# Altium PCB Old.PcbDoc (part 1 of 2)
Units mm, origin at the board's own origin, x right, y up, seen from the top; angles counter-clockwise.
Board outline 332.63 x 105.91 mm, 4 copper layers (Top Copper, Signal Layer 1, Signal Layer 2, Bottom Copper), stack 1.17 mm thick; 206 components, 300 nets, 1472 pads, 0 vias.
Unrouted connection lines stored in the file: 997.
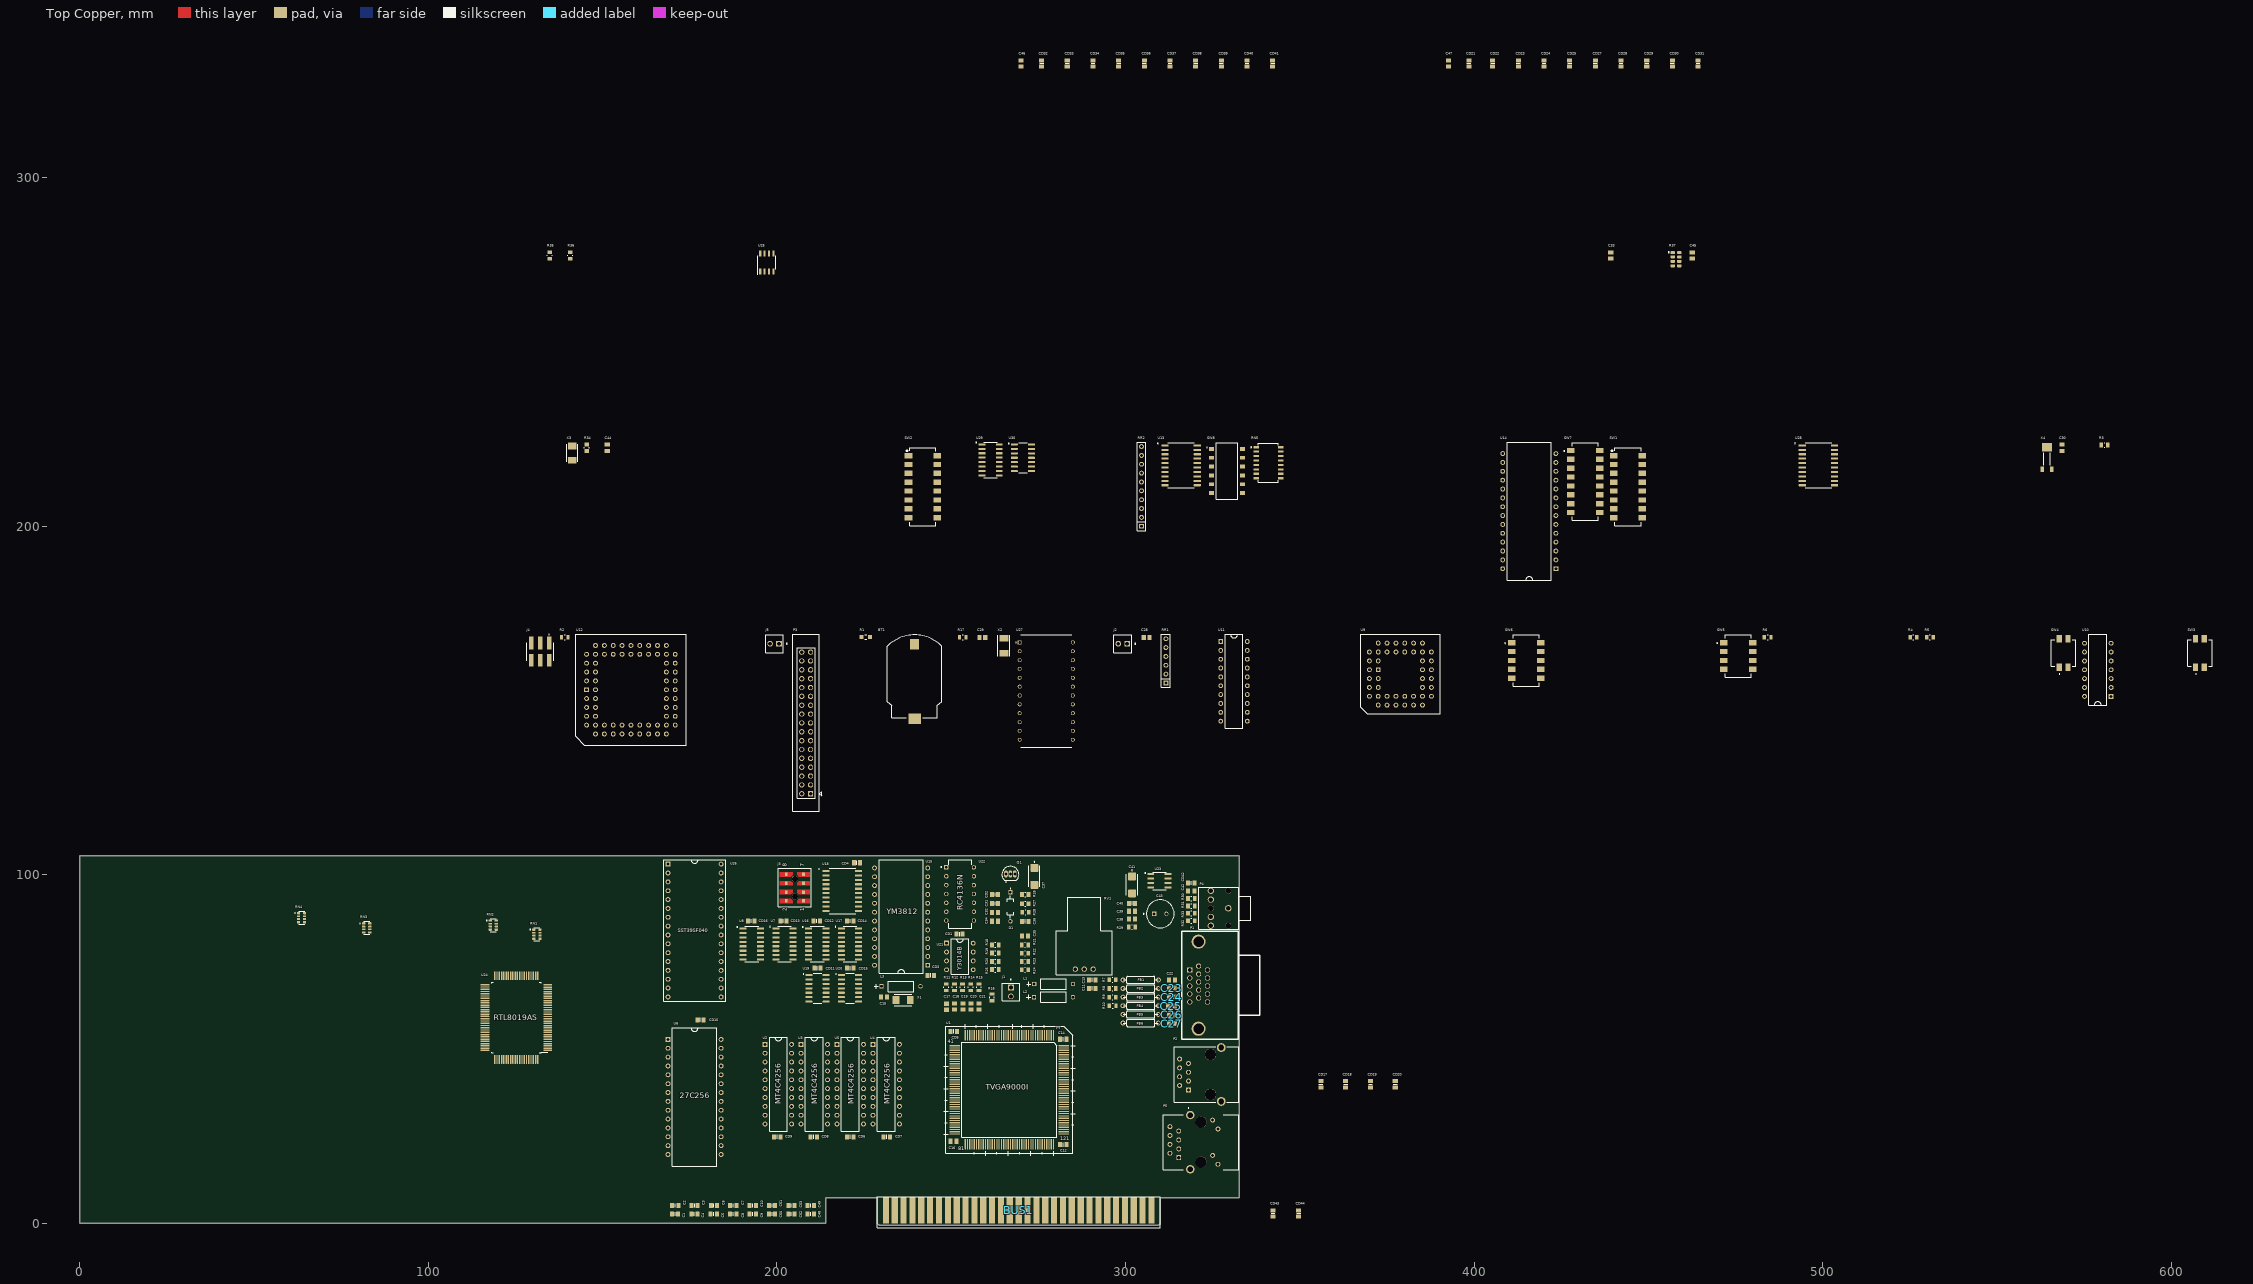
[diagram p0: Top Copper view]
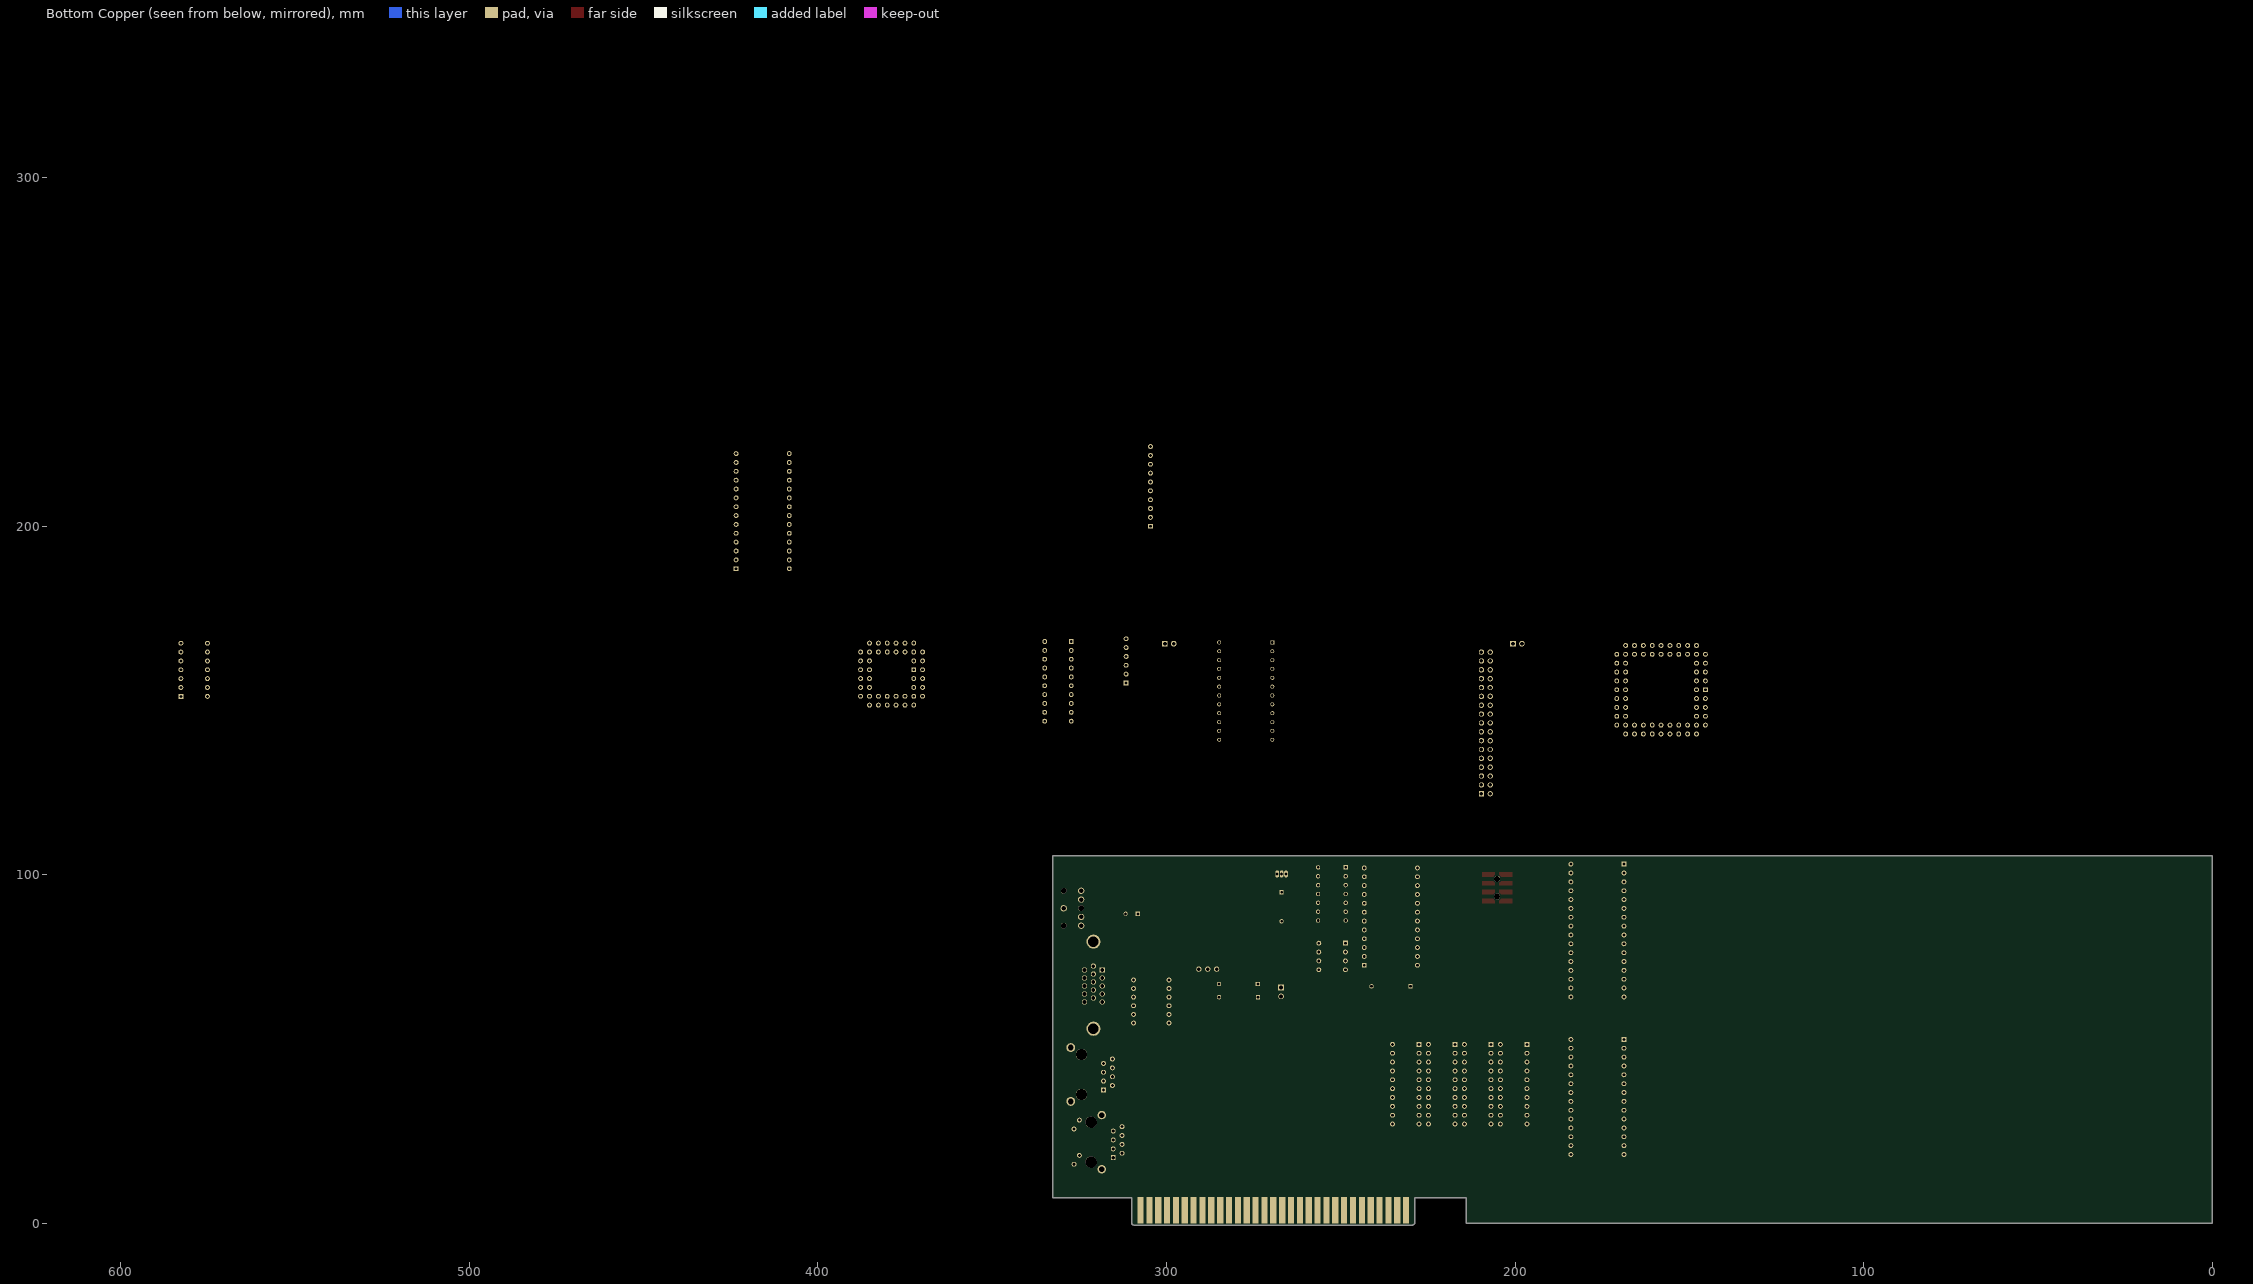
[diagram p1: Bottom Copper view, seen from below]

## Layer stack, top to bottom
Top Mask: solder mask 0.015, Solder Resist, Dk 3.8
Top Copper: signal copper 0.035
Dielectric 1: prepreg 0.1, 2313, Dk 4.05
Signal Layer 1: signal copper 0.0175
Core: core 0.865, FR-4, Dk 4.5
Signal Layer 2: signal copper 0.0175
Dielectric 2: prepreg 0.1, 2313, Dk 4.05
Bottom Copper: signal copper 0.035
Bottom Mask: solder mask 0.015, Solder Resist, Dk 3.8

## Board outline
332.625,105.41 332.625,99 332.625,10.1 cw(c332.624,10.099) 332.625,10.099 332.625,7.4 329.935,7.4 cw(c329.925,10.224) 329.925,7.4 310.025,7.4 310.025,0.2 cw(c309.325,0.2) 309.325,-0.5 229.525,-0.5 cw(c229.575,0.35) 228.725,0.4 228.725,7.4 214,7.4 214,0 0,0 0,105.41

## Design rules (kind name [scope] priority, off if disabled: settings)
Clearance [All] p1: gap=0.254 ignorepadtopadclearanceinfootprint=FALSE except(0: Arc-Hole Track-Hole SMDPad-Hole THPad-Hole Via-Hole Fill-Hole Poly-Hole Region-Hole Text-Hole)
PolygonConnect [All] p1: connectstyle=Relief reliefconductorwidth=0.254 reliefentries=4 polygonreliefangle="90 Angle" airgapwidth=0.254
RoomDefinition "SixPak Ultra" [InComponentClass('SixPak Ultra')] p1: confinementstyle=ConfineIn formatcopy=TRUE lockcomponents=FALSE outline 42.304,109.787 105.525,109.787 105.525,137.828 42.304,137.828
RoutingVias [All] p1: holewidth=0.711 width=1.27 viastyle="Through Hole" minholewidth=0.711 minwidth=1.27 maxholewidth=0.711 maxwidth=1.27
SolderMaskExpansion [All] p1: expansion=0.102 istentingtop=FALSE
Width "Schematic Width Constraint_4" [InNet('GND')] p1: maxlimit=0.508 minlimit=0.254 preferedwidth=0.508 toplayer_minwidth=0.381 midlayer1_maxwidth=0.254 midlayer1_prefwidth=0.254 midlayer2_maxwidth=0.254 midlayer2_prefwidth=0.254 bottomlayer_minwidth=0.381 minimp=50.000000 maximp=50.000000 favimp=50.000000
Width "Schematic Width Constraint_3" [InNet('+12')] p2: maxlimit=0.508 minlimit=0.254 preferedwidth=0.508 toplayer_minwidth=0.381 midlayer1_maxwidth=0.254 midlayer1_prefwidth=0.254 midlayer2_maxwidth=0.254 midlayer2_prefwidth=0.254 bottomlayer_minwidth=0.381 minimp=50.000000 maximp=50.000000 favimp=50.000000
Width "Schematic Width Constraint_2" [InNet('VCC')] p3: maxlimit=0.508 minlimit=0.254 preferedwidth=0.508 toplayer_minwidth=0.381 midlayer1_maxwidth=0.254 midlayer1_prefwidth=0.254 midlayer2_maxwidth=0.254 midlayer2_prefwidth=0.254 bottomlayer_minwidth=0.381 minimp=50.000000 maximp=50.000000 favimp=50.000000
Width "Schematic Width Constraint_1" [InNet('AVDD1')] p4: maxlimit=0.508 minlimit=0.254 preferedwidth=0.508 toplayer_minwidth=0.381 midlayer1_maxwidth=0.254 midlayer1_prefwidth=0.254 midlayer2_maxwidth=0.254 midlayer2_prefwidth=0.254 bottomlayer_minwidth=0.381 minimp=50.000000 maximp=50.000000 favimp=50.000000
Width "Schematic Width Constraint" [InNet('AVDD2')] p5: maxlimit=0.508 minlimit=0.254 preferedwidth=0.508 toplayer_minwidth=0.381 midlayer1_maxwidth=0.254 midlayer1_prefwidth=0.254 midlayer2_maxwidth=0.254 midlayer2_prefwidth=0.254 bottomlayer_minwidth=0.381 minimp=50.000000 maximp=50.000000 favimp=50.000000
Width [All] p6: maxlimit=0.254 minlimit=0.254 preferedwidth=0.254
30 further rules are at their usual default settings.

## Components (designator, comment, footprint, x,y, rotation, side; value= is the part's Value field where it differs from the comment)
BT1 "S8421-45R" BAT_S8421-45R 239.494,157.627 r0 top
BUS1 "BUSPC_DEV" Conn_Bus_ISA8 310.132,7.697 r180 top
C1 "0.1uF" CAPC2012X140N 170.781,2.659 r180 top
C2 "0.1uF" CAPC2012X140N 170.81,5.114 r180 top
C3 "0.1uF" CAPC2012X140N 176.37,5.12 r180 top
C4 "0.1uF" CAPC2012X140N 176.347,2.673 r180 top
C5 "0.1uF" CAPC2012X140N 181.912,2.673 r0 top
C6 "0.1uF" CAPC2012X140N 181.929,5.12 r0 top
C7 "0.1uF" CAPC2012X140N 187.489,5.12 r0 top
C8 "0.1uF" CAPC2012X140N 187.478,2.673 r0 top
C9 "10uF" CAPC2012X140N 193.043,2.673 r180 top
C10 "10uF" CAPC2012X140N 193.049,5.12 r180 top
C11 "10uF" CAPC2012X140N 290.475,67.418 r0 top
C12 "0.1uF" CAPC2012X140N 282.182,22.589 r180 top
C13 "10uF" CAPC2012X140N 290.475,69.837 r0 top
C14 "0.1uF" CAPC2012X140N 282.182,52.815 r0 top
C15 "0.1uF" CAPC2012X145N 230.747,64.88 r0 top
C16 "0.1uF" CAPC2012X145N 250.711,23.554 r180 top
C17 "100pF" CAPC2012X88N#1 248.655,62.117 r90 top
C18 "47pF" CAPC2012X94N 250.949,62.162 r90 top
C19 "470pF" CAPC2012X94N 253.373,62.162 r90 top
C20 "47pF" CAPC2012X94N 255.673,62.162 r90 top
C21 "47pF" CAPC2012X94N 257.969,62.162 r90 top
C22 "47pF" CAPC2012X94N 313.335,69.858 r0 top
C23 "47pF" CAPC2012X94N 313.335,67.493 r0 top
C24 "47pF" CAPC2012X94N 313.335,64.884 r0 top
C25 "1uF" CAPC2012X70 313.195,62.276 r0 top
C26 "47pF" CAPC2012X94N 313.335,59.801 r0 top
C27 "47pF" CAPC2012X94N 313.335,57.327 r0 top
C28 "22p" CAPC2013X145X50NL20T20 306.054,168.067 r0 top
C29 "22p" CAPC2013X145X50NL20T20 258.954,168.067 r0 top
C30 "4700p" CAPC2012X100N 568.723,222.497 r90 top
C31 "10uF" CAPC2012X140N 262.573,91.775 r0 top
C32 "4700p" CAPC2012X100N 262.593,89.216 r180 top
C33 "4700p" CAPC2012X100N 439.224,277.637 r90 top
C34 "4700p" CAPC2012X100N 262.593,86.647 r180 top
C35 "4700p" CAPC2012X100N 271.223,82.405 r180 top
C36 "4.7u Tantalum" CAPC2012X140N 271.248,86.647 r180 top
C37 "10u Tantalum" CAPPM6032X280N 273.876,99.529 r270 top
C38 "1000p" CAPC2012X94N 301.897,87.286 r180 top
C39 "270p" CAPC2012X88N#2 301.902,89.543 r180 top
C40 "0.1uF" CAPC2012X140N 301.882,91.79 r180 top
C41 "10u Tantalum" CAPPM6032X280N 301.892,97.099 r270 top
C42 "4700p" CAPC2012X75N 318.88,95.36 r0 top
C43 "220u" CAPPRD350W60D800H1150 309.995,88.806 r0 top
C44 "10p" CAPC2012X88N#2 151.334,222.497 r90 top
C45 "10p" CAPC2012X88N#2 462.604,277.637 r90 top
C46 "0.01u" CAPC2012X88N#2 270.074,332.777 r90 top
C47 "0.01u" CAPC2012X88N#2 392.634,332.777 r90 top
C48 "0.1uF" CAPC2012X140N 209.739,2.673 r180 top
C49 "10uF" CAPC2012X140N 209.728,5.12 r180 top
C50 "0.1uF" CAPC2012X140N 198.609,2.672 r180 top
C51 "10uF" CAPC2012X140N 198.609,5.12 r180 top
C52 "10uF" CAPC2012X140N 204.174,2.673 r180 top
C53 "10uF" CAPC2012X140N 204.168,5.12 r0 top
CD1 "0.1uF" CAPC2012X140N 252.413,82.955 r0 top
CD2 "0.1uF" CAPC2012X140N 262.573,94.344 r0 top
CD3 "0.1uF" CAPC2012X140N 244.169,71.128 r0 top
CD4 "0.1uF" CAPC2012X140N 222.953,103.437 r180 top
CD5 "0.1uF" CAPC2012X140N 250.731,55.075 r180 top
CD6 "0.1uF" CAPC2012X140N 221.047,24.824 r0 top
CD7 "0.1uF" CAPC2012X140N 231.527,24.824 r0 top
CD8 "0.1uF" CAPC2012X140N 210.568,24.824 r0 top
CD9 "0.1uF" CAPC2012X140N 200.089,24.824 r0 top
CD10 "0.1uF" CAPC2012X140N 178.072,58.365 r180 top
CD11 "0.1uF" CAPC2012X140N 211.632,73.211 r180 top
CD12 "0.1uF" CAPC2012X140N 211.453,86.749 r180 top
CD13 "0.1uF" CAPC2012X140N 201.887,86.749 r180 top
CD14 "0.1uF" CAPC2012X140N 221.018,86.749 r180 top
CD15 "0.1uF" CAPC2012X140N 221.014,73.224 r180 top
CD16 "0.1uF" CAPC2012X140N 192.672,86.749 r180 top
CD17 "0.1uF" CAPC2012X140N 356.065,39.863 r90 top
CD18 "0.1uF" CAPC2012X140N 363.175,39.863 r90 top
CD19 "0.1uF" CAPC2012X140N 370.285,39.863 r90 top
CD20 "0.1uF" CAPC2012X140N 377.395,39.863 r90 top
CD21 "0.1uF" CAPC2012X140N 398.494,332.747 r90 top
CD22 "0.1uF" CAPC2012X140N 405.354,332.747 r90 top
CD23 "0.1uF" CAPC2012X140N 412.714,332.747 r90 top
CD24 "0.1uF" CAPC2012X140N 420.084,332.747 r90 top
CD25 "0.1uF" CAPC2012X140N 427.444,332.747 r90 top
CD27 "0.1uF" CAPC2012X140N 434.814,332.747 r90 top
CD28 "0.1uF" CAPC2012X140N 442.174,332.747 r90 top
CD29 "0.1uF" CAPC2012X140N 449.544,332.747 r90 top
CD30 "0.1uF" CAPC2012X140N 456.904,332.747 r90 top
CD31 "0.1uF" CAPC2012X140N 464.264,332.747 r90 top
CD32 "0.1uF" CAPC2012X140N 275.944,332.747 r90 top
CD33 "0.1uF" CAPC2012X140N 283.304,332.747 r90 top
CD34 "0.1uF" CAPC2012X140N 290.674,332.747 r90 top
CD35 "0.1uF" CAPC2012X140N 298.034,332.747 r90 top
CD36 "0.1uF" CAPC2012X140N 305.404,332.747 r90 top
CD37 "0.1uF" CAPC2012X140N 312.764,332.747 r90 top
CD38 "0.1uF" CAPC2012X140N 320.124,332.747 r90 top
CD39 "0.1uF" CAPC2012X140N 327.494,332.747 r90 top
CD40 "0.1uF" CAPC2012X140N 334.854,332.747 r90 top
CD41 "0.1uF" CAPC2012X140N 342.224,332.747 r90 top
CD42 "10uF" CAPC2012X140N 318.9,97.62 r0 top
CD43 "10uF" CAPC2012X140N 342.303,2.827 r90 top
CD44 "10uF" CAPC2012X140N 349.669,2.827 r90 top
D1 "1N4148" DIOAD829W49L456D191 266.992,90.793 r270 top
FB1 "FILTER" FILTER 299.294,69.833 r0 top
FB2 "FILTER" FILTER 299.294,67.358 r0 top
FB3 "FILTER" FILTER 299.294,64.884 r0 top
FB4 "FILTER" FILTER 309.454,62.41 r180 top
FB5 "FILTER" FILTER 309.454,59.936 r180 top
FB6 "FILTER" FILTER 309.454,57.462 r180 top
J1 "640452-2" TE_640452-2 267.145,67.648 r90 top
J2 "640452-2" TE_640452-2 300.474,166.287 r0 top
J3 "OPL CS" SAMTEC-TSM-104-01-X-DV-A 205.143,96.293 r90 top
J4 "OPL_IRQ" SAMTEC_TSM-103-01-T-DV 132.104,164.007 r0 top
J5 "640452-2" TE_640452-2 200.584,166.287 r0 top
L1 "5.7 uH" IND_BOURNS_78F 273.777,68.653 r0 top
L2 "5.7 uH" IND_BOURNS_78F 273.767,64.884 r0 top
L3 "2.7 uH" IND_BOURNS_78F 230.02,67.978 r0 top
P1 "VGA" VGA_Conn 316.154,52.752 r0 top
P2 "A-2004-2-4-LP/S-R" ASSMANN_A-2004-1-4-LP-N-R 324.425,42.7 r90 top
P3 "FLOPPY" "Floppy Connector" 212.204,118.027 r90 top
P4 "AUDIO_OUT" Headphone 321.065,84.421 r0 top
P5 "RJMG1BD3B8K1ANR" CONN_RJMG1BD3B8K1ANR 321.635,23.28 r90 top
Q1 "2N3904" TO92127P495H495-3 266.992,100.236 r0 top
R1 "100" RES_ERJ6ENF1000V 225.514,168.197 r0 top
R2 "1k" RESC2012X60N 139.154,168.147 r0 top
R3 "150" RESC2012X70N 580.893,223.287 r0 top
R4 "33" RESC2012X65N 526.034,168.147 r0 top
R5 "33" RESC2012X65N 530.774,168.147 r0 top
R6 "4.7k" RESC2012X60N 484.244,168.147 r0 top
R7 "150" RESC2012X70N 296.271,69.858 r180 top
R8 "150" RESC2012X70N 296.271,67.358 r180 top
R9 "150" RESC2012X70N 296.271,64.884 r180 top
R10 "4.7k" RESC2012X60N 296.316,62.41 r180 top
R11 "4.7k" RESC2012X60N 248.595,67.735 r90 top
R12 "4.7k" RESC2012X60N 250.939,67.735 r90 top
R13 "4.7k" RESC2012X60N 253.282,67.735 r90 top
R14 "4.7k" RESC2012X60N 255.626,67.735 r90 top
R15 "4.7k" RESC2012X60N 257.969,67.735 r90 top
R16 "4.7k" RESC2012X60N 261.684,64.803 r270 top
R17 "2.2k" RESC2012X60N 253.334,168.147 r0 top
R18 "2.2k" RESC2012X70N 262.658,79.89 r0 top
R19 "2.2k" RESC2012X70N 262.658,77.519 r180 top
R20 "12K" RESC2012X70N 262.658,75.149 r0 top
R21 "10k" RESC2012X70N 271.158,79.89 r0 top
R22 "2.2k" RESC2012X70N 271.158,77.493 r0 top
R23 "2.2k" RESC2012X70N 271.158,75.122 r180 top
R24 "1.5k" RESC2012X70N 271.158,72.752 r0 top
R25 "10k" RESC2012X70N 262.658,72.778 r180 top
R26 "2.2k" RESC2012X70N 271.26,94.344 r0 top
R27 "2.2k" RESC2012X70N 271.26,91.677 r0 top
R28 "10k" RESC2012X70N 271.288,89.264 r0 top
R29 "8.2k" RESC2012X70N 301.897,84.983 r180 top
R30 "10" RESC2012X70N 318.885,93.192 r0 top
R31 "10k" RESC2012X70N 318.885,91.07 r0 top
R32 "10" RESC2012X70N 318.885,86.825 r0 top
R33 "10" RESC2012X70N 318.885,88.948 r0 top
R34 "1M" RESC2012X70N 145.434,222.497 r90 top
R35 "470" RESC2012X70N 134.834,277.637 r90 top
R36 "470" RESC2012X70N 140.694,277.637 r90 top
R37 "27k" RESCAV127P508X200X70-8N 457.954,276.597 r0 top
RN1 "10k" RESCAXS80P320X160X60-8N 131.134,82.958 r0 top
RN2 "10k" RESCAXS80P320X160X60-8N 118.637,85.56 r0 top
RN3 "10k" RESCAXS80P320X160X60-8N 82.334,84.742 r0 top
RN4 "10k" RESCAXS80P320X160X60-8N 63.639,87.701 r0 top
RN5 "10k" SOIC127P762X240-16N 341.014,218.207 r0 top
RR1 "1k" "Res Network RR2 Floppy" 312.914,153.587 r90 top
RR2 "10k" "Res Network RR1 Floppy ROM" 306.004,198.717 r90 top
RV1 "10k" Potentiometer 296.177,71.28 r90 top
SW1 "1-1825058-9" SW_1-1825058-9 444.174,211.347 r0 top
SW2 "1-1825058-9" SW_1-1825058-9 241.884,211.347 r0 top
SW3 "1825059-1" SW_1825059-1 608.253,163.617 r90 top
SW4 "1825059-1" SW_1825059-1 569.123,163.617 r90 top
SW5 "1-1825059-7" SW_1-1825059-7 475.804,162.757 r0 top
SW6 "2-1825059-3" SW_2-1825059-3 414.954,161.487 r0 top
SW7 "4-1825059-1" SW_4-1825059-1 431.944,212.817 r0 top
SW8 "DS04-254-2-06BK-SMT-TR" SW_DS04-254-2-06BK-SMT-TR 329.134,215.837 r0 top
U1 "TVGA9000I" TVGA9000 284.973,20.005 r90 top
U2 "MT4C4256" MT4C4256 197.758,53.5 r270 top
U3 "MT4C4256" MT4C4256 208.068,53.5 r270 top
U4 "MT4C4256" MT4C4256 228.689,53.5 r270 top
U5 "MT4C4256" MT4C4256 218.379,53.5 r270 top
U6 "27C256" 27C256 170.041,56.066 r270 top
U7 "SN74ALS138ADR" SOIC127P600X175-16N 202.172,80.113 r0 top
U8 "SN74ALS138ADR" SOIC127P600X175-16N 192.774,80.114 r0 top
U9 "16550-PLCC" 16550_PLCC 368.324,146.887 r0 top
U10 "1.8432MHz" "Osc_Socket 4PIN" 581.633,148.587 r90 top
U11 "GD75232" GD75232 326.444,141.647 r0 top
U12 "82077AA" 82077AA 143.264,138.347 r0 top
U13 "SN74LS688DW" SOIC127P1030X265-20N 315.964,217.467 r0 top
U14 "28C64" 27C256 422.204,184.497 r90 top
U15 "YM3812" YM3812 243.396,71.611 r90 top
U16 "SN74ALS138ADR" SOIC127P600X175-16N 211.57,80.113 r0 top
U17 "SN74ALS138ADR" SOIC127P600X175-16N 220.968,80.114 r0 top
U18 "SN74LS245DW" SOIC127P1030X265-20N 218.758,95.36 r0 top
U19 "SN74LS04DR" SOIC127P600X175-14N 211.643,67.42 r0 top
U20 "SN74LS74AD" SOIC127P600X175-14N 220.968,67.42 r0 top
U21 "Y3014B" Y3014B 248.223,81.821 r270 top
U22 "RC4136N" DIP794W45P254L1969H508Q14 252.565,94.487 r0 top
U23 "LM386MX-1/NOPB" SOIC127P599X175-8N 309.715,98.255 r0 top
U24 "RTL8019AS" "Ethernet Controller" 135.098,45.972 r90 top
U25 "93LC46C" 93LC46C 194.324,271.967 r0 top
U26 "SST39SF040" SST39LF040 167.374,63.677 r0 top
U27 "DS12885" DIP1524W46P254L3226H508Q24 277.284,152.697 r0 top
U28 "SN74LS688DW" SOIC127P1030X265-20N 498.814,217.467 r0 top
U29 "SN74HCT139D" SOIC127P600X175-16N 261.334,219.017 r0 top
U30 "CD74HC04M" SOIC127P600X175-14N 270.594,219.627 r0 top
X1 "ABM3-40.000MHZ-B2-T" XTAL_ABM3-40.000MHZ-B2-T 236.208,64.067 r0 top
X2 "ABM7-24.000MHZ-D2Y-T" XTAL_ABM7-24.000MHZ-D2Y-T 265.104,165.727 r90 top
X3 "20MHz" XTAL_ABM3-20.000MHZ-B2-T 141.324,220.967 r90 top
X4 "32.768K" XTAL_MS1V-T1K-32.768KHZ-7PF-20PPM-TA-QC-AU 564.373,219.907 r0 top

## Footprints (in the part's own frame and the unit in brackets; to place one, negate y for a bottom-side part, rotate by r counter-clockwise, add the part's x,y. Pads: shape width x height; smd on the part's side, far side on the other; paste and mask are expansions set on the pad)
27C256 [mil]
  rect 55x55 hole 32 paste-55 mask+10: 1(130,-50)
  round 55 hole 32 paste-55 mask+10: 2(230,-50) 3(330,-50) 4(430,-50) 5(530,-50) 6(630,-50) 7(730,-50) 8(830,-50) 9(930,-50) 10(1030,-50) 11(1130,-50) 12(1230,-50) 13(1330,-50) 14(1430,-50) 15(1430,550) 16(1330,550) 17(1230,550) 18(1130,550) 19(1030,550) 20(930,550) 21(830,550) 22(730,550) 23(630,550) 24(530,550) 25(430,550) 26(330,550) 27(230,550) 28(130,550)
  silkscreen extent 0,0 1560,500
93LC46C [mm]
  rrect25% 0.6x1.75 smd mask+0: 1(0.889,1.108) 2(2.159,1.108) 3(3.429,1.108) 4(4.699,1.108) 5(4.699,6.258) 6(3.429,6.258) 7(2.159,6.258) 8(0.889,6.258)
  silkscreen extent 0.23,0.23 5.35,5.63
16550_PLCC [mil]
  rect 55x55 hole 32 paste-55 mask+10: 1(165,470)
  round 55 hole 32 paste-55 mask+10: 2(65,370) 3(165,370) 4(65,270) 5(165,270) 6(65,170) 7(165,70) 8(165,170) 9(265,70) 10(265,170) 11(365,70) 12(365,170) 13(465,70) 14(465,170) 15(565,70) 16(565,170) 17(665,70) 18(765,170) 19(665,170) 20(765,270) 21(665,270) 22(765,370) 23(665,370) 24(765,470) 25(665,470) 26(765,570) 27(665,570) 28(765,670) 29(665,770) 30(665,670) 31(565,770) 32(565,670) 33(465,770) 34(465,670) 35(365,770) 36(365,670) 37(265,770) 38(265,670) 39(165,770) 40(65,670) 41(165,670) 42(65,570) 43(165,570) 44(65,470)
  silkscreen extent -35,-30 865,870
82077AA [mil]
  rect 55x55 hole 32 paste-55 mask+10: 1(85,580)
  round 55 hole 32 paste-55 mask+10: 2(185,580) 3(85,480) 4(185,480) 5(85,380) 6(185,380) 7(85,280) 8(185,280) 9(85,180) 10(185,80) 11(185,180) 12(285,80) 13(285,180) 14(385,80) 15(385,180) 16(485,80) 17(485,180) 18(585,80) 19(585,180) 20(685,80) 21(685,180) 22(785,80) 23(785,180) 24(885,80) 25(885,180) 26(985,80) 27(1085,180) 28(985,180) 29(1085,280) 30(985,280) 31(1085,380) 32(985,380) 33(1085,480) 34(985,480) 35(1085,580) 36(985,580) 37(1085,680) 38(985,680) 39(1085,780) 40(985,780) 41(1085,880) 42(985,880) 43(1085,980) 44(985,1080) 45(985,980) 46(885,1080) 47(885,980) 48(785,1080) 49(785,980) 50(685,1080) 51(685,980) 52(585,1080) 53(585,980) 54(485,1080) 55(485,980) 56(385,1080) 57(385,980) 58(285,1080) 59(285,980) 60(185,1080) 61(85,980) 62(185,980) 63(85,880) 64(185,880) 65(85,780) 66(185,780) 67(85,680) 68(185,680)
  silkscreen extent -40,-45 1210,1205
ASSMANN_A-2004-1-4-LP-N-R [mm]
  rect 1.408x1.408 hole 0.9: 1(-4.445,6.35)
  round 1.408 hole 0.9: 2(-3.175,8.89) 3(-1.905,6.35) 4(-0.635,8.89) 5(0.635,6.35) 6(1.905,8.89) 7(3.175,6.35) 8(4.445,8.89)
  round 2.55 hole 1.7: S1(-7.715,-3.05) S2(7.715,-3.05)
  round 3.2 hole 3.2 unplated: ""(-5.715,0) ""(5.715,0)
  silkscreen extent -9.72,-8.13 8,10.37
BAT_S8421-45R [mm]
  rect 2.6x3 smd: NEG(0,8.5)
  rect 3.6x3 smd: POS(0,-12.9)
  silkscreen extent -7.8,-12.64 7.8,11.18
CAPC2012X70 [mm]
  rect 1.3x1.5 smd: 1(-0.95,0) 2(0.95,0)
  silkscreen extent -0.15,-0.65 0.15,0.65
CAPC2012X75N [mm]
  rect 1.15x1.47 smd: 1(-0.88,0) 2(0.88,0)
  body extent -1,-0.63 1,0.63, height 0.75
CAPC2012X88N#1 [mm]
  rect 1.24x1.56 smd: 1(-0.885,0) 2(0.885,0)
CAPC2012X88N#2 [mm]
  rect 1.16x1.47 smd: 1(-0.875,0) 2(0.875,0)
CAPC2012X94N [mm]
  rect 1.16x1.47 smd: 1(-0.88,0) 2(0.88,0)
CAPC2012X100N [mm]
  rect 1.16x1.47 smd: 1(-0.875,0) 2(0.875,0)
CAPC2012X140N [mm]
  rect 1.15x1.45 smd: 1(-0.9,0) 2(0.9,0)
  silkscreen extent 0,-0.55 0,0.55
CAPC2012X145N [mm]
  rect 1.15x1.47 smd: 1(-0.88,0) 2(0.88,0)
  body extent -1,-0.63 1,0.63, height 1.45
CAPC2013X145X50NL20T20 [mm] "Chip Capacitor, 2-Leads, Body 2.00x1.25mm, IPC Medium Density"
  rect 1.25x1.45 smd: 1(-0.825,0) 2(0.825,0)
  body extent -1.1,-0.72 1.1,0.72, height 1.45
CAPPM6032X280N [mm]
  rrect25% 2.24x2.32 smd: 1(-2.435,0) 2(2.435,0)
  silkscreen extent -4.28,-1.6 3,1.6
CAPPRD350W60D800H1150 [mm]
  round 1.2 hole 0.85: N(1.75,0)
  rect 1.2x1.2 hole 0.85: P(-1.75,0)
  silkscreen extent -4.85,-4 4,4, body extent -4,-4 4,4, height 11.5
Conn_Bus_ISA8 [mil]
  rect 70x300 smd far side paste-300 mask+10: 1(3105,155) 2(3005,155) 3(2905,155) 4(2805,155) 5(2705,155) 6(2605,155) 7(2505,155) 8(2405,155) 9(2305,155) 10(2205,155) 11(2105,155) 12(2005,155) 13(1905,155) 14(1805,155) 15(1705,155) 16(1605,155) 17(1505,155) 18(1405,155) 19(1305,155) 20(1205,155) 21(1105,155) 22(1005,155) 23(905,155) 24(805,155) 25(705,155) 26(605,155) 27(505,155) 28(405,155) 29(305,155) 30(205,155) 31(105,155)
  rect 70x300 smd paste-300 mask+10: 32(3105,155) 33(3005,155) 34(2905,155) 35(2805,155) 36(2705,155) 37(2605,155) 38(2505,155) 39(2405,155) 40(2305,155) 41(2205,155) 42(2105,155) 43(2005,155) 44(1905,155) 45(1805,155) 46(1705,155) 47(1605,155) 48(1505,155) 49(1405,155) 50(1305,155) 51(1205,155) 52(1105,155) 53(1005,155) 54(905,155) 55(805,155) 56(705,155) 57(605,155) 58(505,155) 59(405,155) 60(305,155) 61(205,155) 62(105,155)
  silkscreen extent 5,5 3205,355
CONN_RJMG1BD3B8K1ANR [mm]
  round 2.4 hole 1.6: 1(-7.775,3.05) 2(7.775,3.05)
  round 1.398 hole 0.89: L1(6.325,-3.38) L2(3.785,-4.9) L3(-3.785,-3.38) L4(-6.325,-4.9)
  rect 1.408x1.408 hole 0.9: R1(-4.45,6.34)
  round 1.408 hole 0.9: R2(-3.18,8.88) R3(-1.91,6.34) R4(-0.63,8.88) R5(0.64,6.34) R6(1.91,8.88) R7(3.18,6.34) R8(4.45,8.88)
  round 3.25 hole 3.25 unplated: ""(-5.715,0) ""(5.715,0)
  silkscreen extent -7.87,-10.89 7.88,10.83
DIOAD829W49L456D191 [mm]
  round 1.238 hole 0.73: A(4.146,0)
  rect 1.238x1.238 hole 0.73: C(-4.146,0)
  silkscreen extent -5.4,-0.96 3.2,0.96
DIP794W45P254L1969H508Q14 [mm]
  rect 1.248x1.248 hole 0.74: 1(-3.97,7.62)
  round 1.248 hole 0.74: 2(-3.97,5.08) 3(-3.97,2.54) 4(-3.97,0) 5(-3.97,-2.54) 6(-3.97,-5.08) 7(-3.97,-7.62) 8(3.97,-7.62) 9(3.97,-5.08) 10(3.97,-2.54) 11(3.97,0) 12(3.97,2.54) 13(3.97,5.08) 14(3.97,7.62)
  silkscreen extent -5.57,-9.85 3.3,9.85
DIP1524W46P254L3226H508Q24 [mm]
  rect 1.14x1.14 hole 0.79: 1(-7.62,13.97)
  round 1.14 hole 0.79: 2(-7.62,11.43) 3(-7.62,8.89) 4(-7.62,6.35) 5(-7.62,3.81) 6(-7.62,1.27) 7(-7.62,-1.27) 8(-7.62,-3.81) 9(-7.62,-6.35) 10(-7.62,-8.89) 11(-7.62,-11.43) 12(-7.62,-13.97) 13(7.62,-13.97) 14(7.62,-11.43) 15(7.62,-8.89) 16(7.62,-6.35) 17(7.62,-3.81) 18(7.62,-1.27) 19(7.62,1.27) 20(7.62,3.81) 21(7.62,6.35) 22(7.62,8.89) 23(7.62,11.43) 24(7.62,13.97)
  silkscreen extent -8.79,-16.13 7.3,16.13
"Ethernet Controller" [mm]
  rrect25% 0.4x2.5 smd mask+0: 1(3.629,0.858) 2(4.279,0.858) 3(4.929,0.858) 4(5.579,0.858) 5(6.204,0.858) 6(6.854,0.858) 7(7.504,0.858) 8(8.154,0.858) 9(8.804,0.858) 10(9.454,0.858) 11(10.104,0.858) 12(10.754,0.858) 13(11.404,0.858) 14(12.054,0.858) 15(12.704,0.858) 16(13.354,0.858) 17(14.004,0.858) 18(14.654,0.858) 19(15.304,0.858) 20(15.954,0.858) 21(16.604,0.858) 22(17.254,0.858) 23(17.904,0.858) 24(18.554,0.858) 25(19.204,0.858) 26(19.854,0.858) 27(20.504,0.858) 28(21.154,0.858) 29(21.804,0.858) 30(22.454,0.858) 51(22.479,18.858) 52(21.829,18.858) 53(21.179,18.858) 54(20.529,18.858) 55(19.879,18.858) 56(19.229,18.858) 57(18.579,18.858) 58(17.929,18.858) 59(17.279,18.858) 60(16.629,18.858) 61(15.979,18.858) 62(15.329,18.858) 63(14.679,18.858) 64(14.029,18.858) 65(13.379,18.858) 66(12.729,18.858) 67(12.079,18.858) 68(11.429,18.858) 69(10.779,18.858) 70(10.129,18.858) 71(9.479,18.858) 72(8.829,18.858) 73(8.179,18.858) 74(7.529,18.858) 75(6.879,18.858) 76(6.229,18.858) 77(5.579,18.858) 78(4.929,18.858) 79(4.279,18.858) 80(3.629,18.858)
  rrect25% 2.5x0.4 smd mask+0: 31(25.054,3.683) 32(25.054,4.333) 33(25.054,4.983) 34(25.054,5.633) 35(25.054,6.283) 36(25.054,6.933) 37(25.054,7.583) 38(25.054,8.233) 39(25.054,8.883) 40(25.054,9.533) 41(25.054,10.183) 42(25.054,10.833) 43(25.054,11.483) 44(25.054,12.133) 45(25.054,12.783) 46(25.054,13.433) 47(25.054,14.083) 48(25.054,14.733) 49(25.054,15.383) 50(25.054,16.033) 81(1.054,16.033) 82(1.054,15.383) 83(1.054,14.733) 84(1.054,14.083) 85(1.054,13.433) 86(1.054,12.783) 87(1.054,12.133) 88(1.054,11.483) 89(1.054,10.833) 90(1.054,10.183) 91(1.054,9.533) 92(1.054,8.883) 93(1.054,8.233) 94(1.054,7.583) 95(1.054,6.933) 96(1.054,6.283) 97(1.054,5.633) 98(1.054,4.983) 99(1.054,4.333) 100(1.054,3.683)
  silkscreen extent 2.94,0.86 23.16,16.97
FILTER [mil]
  round 55 hole 32 paste-55 mask+10: 1(0,0) 2(400,0)
  silkscreen extent 0,-40 400,40
"Floppy Connector" [mil]
  rect 60x60 hole 40 paste-60 mask+10: 1(205,100)
  round 60 hole 40 paste-60 mask+10: 2(205,200) 3(305,100) 4(305,200) 5(405,100) 6(405,200) 7(505,100) 8(505,200) 9(605,100) 10(605,200) 11(705,100) 12(705,200) 13(805,100) 14(805,200) 15(905,100) 16(905,200) 17(1005,100) 18(1005,200) 19(1105,100) 20(1105,200) 21(1205,100) 22(1205,200) 23(1305,100) 24(1305,200) 25(1405,100) 26(1405,200) 27(1505,100) 28(1505,200) 29(1605,100) 30(1605,200) 31(1705,100) 32(1705,200) 33(1805,100) 34(1805,200)
  silkscreen extent 5,-25 2005,300
GD75232 [mil]
  rect 55x55 hole 32 paste-55 mask+10: 1(35,995)
  round 55 hole 32 paste-55 mask+10: 2(35,895) 3(35,795) 4(35,695) 5(35,595) 6(35,495) 7(35,395) 8(35,295) 9(35,195) 10(35,95) 11(335,95) 12(335,195) 13(335,295) 14(335,395) 15(335,495) 16(335,595) 17(335,695) 18(335,795) 19(335,895) 20(335,995)
  silkscreen extent 85,15 285,1075
Headphone [mil]
  round 70.9 hole 51.2 paste-70.9 mask+0: 1(331.9,235) 2(135,431.9) 3(135,333.4) 4(135,136.6) 5(135,38.1)
  round 63 hole 63 paste-63 mask+0: Un1(135,235) Un2(331.9,431.9) Un3(331.9,38.1)
  silkscreen extent -3,-1 588,471
IND_BOURNS_78F [mil]
  rect 50x50 hole 30 mask+0: 1(0,0)
  round 50 hole 30 mask+0: 2(440,0)
  silkscreen extent -85,-60 365,60, body extent -10,-55 450,55, height 110
MT4C4256 [mil]
  rect 55x55 hole 32 paste-55 mask+10: 1(85,-45)
  round 55 hole 32 paste-55 mask+10: 2(185,-45) 3(285,-45) 4(385,-45) 5(485,-45) 6(585,-45) 7(685,-45) 8(785,-45) 9(885,-45) 10(985,-45) 11(985,255) 12(885,255) 13(785,255) 14(685,255) 15(585,255) 16(485,255) 17(385,255) 18(285,255) 19(185,255) 20(85,255)
  silkscreen extent 5,5 1065,205
"Osc_Socket 4PIN" [mil]
  rect 55x55 hole 32 paste-55 mask+10: 1(102.17,-44.76)
  round 55 hole 32 paste-55 mask+10: 2(202.17,-44.76) 3(302.17,-44.76) 4(402.17,-44.76) 5(502.17,-44.76) 6(602.17,-44.76) 7(702.17,-44.76) 8(702.17,255.24) 9(602.17,255.24) 10(502.17,255.24) 11(402.17,255.24) 12(302.17,255.24) 13(202.17,255.24) 14(102.17,255.24)
  silkscreen extent 2,5 802,205
Potentiometer [mil]
  round 60 hole 40 paste-60 mask+0: 1(65,215) 2(65,315) 3(65,415)
  silkscreen extent 0,0 875,630
"Res Network RR1 Floppy ROM" [mil]
  rect 55x55 hole 32 paste-55 mask+10: 1(50,55)
  round 55 hole 32 paste-55 mask+10: 2(150,55) 3(250,55) 4(350,55) 5(450,55) 6(550,55) 7(650,55) 8(750,55) 9(850,55) 10(950,55)
  silkscreen extent 0,5 1000,105
"Res Network RR2 Floppy" [mil]
  rect 55x55 hole 32 paste-55 mask+10: 1(55.93,52.43)
  round 55 hole 32 paste-55 mask+10: 2(155.93,52.43) 3(255.93,52.43) 4(355.93,52.43) 5(455.93,52.43) 6(555.93,52.43)
  silkscreen extent 6,2 606,102
RES_ERJ6ENF1000V [mm]
  rect 1.15x1.15 smd: 1(-1.175,0) 2(1.175,0)
  silkscreen extent -0.28,-0.62 0.28,0.62
RESC2012X60N [mm]
  rect 0.92x1.38 smd: 1(-0.955,0) 2(0.955,0)
  silkscreen extent -0.17,-0.68 0.17,0.68
RESC2012X65N [mm]
  rect 1.01x1.38 smd: 1(-0.95,0) 2(0.95,0)
  silkscreen extent -0.12,-0.68 0.12,0.68
RESC2012X70N [mm]
  rect 1.04x1.38 smd: 1(-0.94,0) 2(0.94,0)
  silkscreen extent -0.1,-0.68 0.1,0.68
RESCAV127P508X200X70-8N [mm]
  rrect53% 1.24x0.86 smd: 1(-0.94,1.905) 2(-0.94,0.635) 3(-0.94,-0.635) 4(-0.94,-1.905) 5(0.94,-1.905) 6(0.94,-0.635) 7(0.94,0.635) 8(0.94,1.905)
  silkscreen extent -2.2,1.85 -1.9,2.15
RESCAXS80P320X160X60-8N [mm]
  rrect50% 0.93x0.68 smd: 1(-0.87,1.3) 4(-0.87,-1.3) 5(0.87,-1.3) 8(0.87,1.3)
  rrect50% 0.93x0.48 smd: 2(-0.87,0.4) 3(-0.87,-0.4) 6(0.87,-0.4) 7(0.87,0.4)
  silkscreen extent -2,-1.85 0.88,1.85, body extent -1.6,-0.8 1.6,0.8, height 0.6
SAMTEC-TSM-104-01-X-DV-A [mil]
  rect 40x30 smd mask+0: 1(-150,-97.48) 2(-150,97.48) 3(-50,-97.48) 4(-50,97.48) 5(50,-97.48) 6(50,97.48) 7(150,-97.48) 8(150,97.48)
  round 68.11 hole 68.11 unplated: MH1(100,0) MH2(-100,0)
  Top Copper region: -125,-169.92 -125,-45.12 -145.08,-25.04 -175,-25.04 -175,-169.92 -125,-169.92 -125,-169.92
  Top Copper region: -125,169.92 -125,45.12 -145.08,25.04 -175,25.04 -175,169.92 -125,169.92 -125,169.92
  Top Copper region: -75,-169.92 -75,-45.12 -54.92,-25.04 -25,-25.04 -25,-169.92 -75,-169.92 -75,-169.92
  Top Copper region: -75,169.92 -75,45.12 -54.92,25.04 -25,25.04 -25,169.92 -75,169.92 -75,169.92
  Top Copper region: 75,-169.92 75,-45.12 54.92,-25.04 25,-25.04 25,-169.92 75,-169.92 75,-169.92
  Top Copper region: 75,169.92 75,45.12 54.92,25.04 25,25.04 25,169.92 75,169.92 75,169.92
  Top Copper region: 125,-169.92 125,-45.12 145.08,-25.04 175,-25.04 175,-169.92 125,-169.92 125,-169.92
  Top Copper region: 125,169.92 125,45.12 145.08,25.04 175,25.04 175,169.92 125,169.92 125,169.92
  silkscreen extent -218,-188 218,188
SAMTEC_TSM-103-01-T-DV [mm]
  rect 1.27x3.68 smd: 01(2.54,2.475) 02(2.54,-2.475) 03(0,2.475) 04(0,-2.475) 05(-2.54,2.475) 06(-2.54,-2.475)
  silkscreen extent -3.81,-2.54 3.81,5, body extent -3.81,-3.85 3.81,3.85, height 9.91
SOIC127P599X175-8N [mm]
  rrect25% 1.97x0.6 smd: 1(-2.47,1.905) 2(-2.47,0.635) 3(-2.47,-0.635) 4(-2.47,-1.905) 5(2.47,-1.905) 6(2.47,-0.635) 7(2.47,0.635) 8(2.47,1.905)
  silkscreen extent -4.14,-2.53 1.95,2.53
SOIC127P600X175-14N [mm]
  rrect50% 1.97x0.6 smd: 1(-2.475,3.81) 2(-2.475,2.54) 3(-2.475,1.27) 4(-2.475,0) 5(-2.475,-1.27) 6(-2.475,-2.54) 7(-2.475,-3.81) 8(2.475,-3.81) 9(2.475,-2.54) 10(2.475,-1.27) 11(2.475,0) 12(2.475,1.27) 13(2.475,2.54) 14(2.475,3.81)
  silkscreen extent -4.15,-4.33 1.17,4.33, body extent -3,-4.33 3,4.33, height 1.75
SOIC127P600X175-16N [mm]
  rrect25% 1.97x0.6 smd: 1(-2.475,4.445) 2(-2.475,3.175) 3(-2.475,1.905) 4(-2.475,0.635) 5(-2.475,-0.635) 6(-2.475,-1.905) 7(-2.475,-3.175) 8(-2.475,-4.445) 9(2.475,-4.445) 10(2.475,-3.175) 11(2.475,-1.905) 12(2.475,-0.635) 13(2.475,0.635) 14(2.475,1.905) 15(2.475,3.175) 16(2.475,4.445)
  silkscreen extent -4.24,-5.06 1.95,5.06
SOIC127P762X240-16N [mm]
  rrect15% 1.59x0.6 smd: 1(-3.495,4.445) 2(-3.495,3.175) 3(-3.495,1.905) 4(-3.495,0.635) 5(-3.495,-0.635) 6(-3.495,-1.905) 7(-3.495,-3.175) 8(-3.495,-4.445) 9(3.495,-4.445) 10(3.495,-3.175) 11(3.495,-1.905) 12(3.495,-0.635) 13(3.495,0.635) 14(3.495,1.905) 15(3.495,3.175) 16(3.495,4.445)
  silkscreen extent -5.04,-5.65 2.86,5.65
SOIC127P1030X265-20N [mm]
  rrect25% 2.06x0.6 smd: 1(-4.64,5.715) 2(-4.64,4.445) 3(-4.64,3.175) 4(-4.64,1.905) 5(-4.64,0.635) 6(-4.64,-0.635) 7(-4.64,-1.905) 8(-4.64,-3.175) 9(-4.64,-4.445) 10(-4.64,-5.715) 11(4.64,-5.715) 12(4.64,-4.445) 13(4.64,-3.175) 14(4.64,-1.905) 15(4.64,-0.635) 16(4.64,0.635) 17(4.64,1.905) 18(4.64,3.175) 19(4.64,4.445) 20(4.64,5.715)
  silkscreen extent -6.8,-6.5 3.8,6.5
SST39LF040 [mil]
  rect 55x55 hole 32 paste-55 mask+0: 1(55,1550)
  round 55 hole 32 paste-55 mask+0: 2(55,1450) 3(55,1350) 4(55,1250) 5(55,1150) 6(55,1050) 7(55,950) 8(55,850) 9(55,750) 10(55,650) 11(55,550) 12(55,450) 13(55,350) 14(55,250) 15(55,150) 16(55,50) 17(655,50) 18(655,150) 19(655,250) 20(655,350) 21(655,450) 22(655,550) 23(655,650) 24(655,750) 25(655,850) 26(655,950) 27(655,1050) 28(655,1150) 29(655,1250) 30(655,1350) 31(655,1450) 32(655,1550)
  silkscreen extent 5,0 705,1600
SW_1-1825058-9 [mm]
  rect 2.16x1.52 smd: 1(-4.13,8.89) 1.1(4.13,8.89) 2(-4.13,6.35) 2.1(4.13,6.35) 3(-4.13,3.81) 3.1(4.13,3.81) 4(-4.13,1.27) 4.1(4.13,1.27) 5(-4.13,-1.27) 5.1(4.13,-1.27) 6(-4.13,-3.81) 6.1(4.13,-3.81) 7(-4.13,-6.35) 7.1(4.13,-6.35) 8(-4.13,-8.89) 8.1(4.13,-8.89)
  silkscreen extent -4.79,-11.15 3.75,11.15
SW_1-1825059-7 [mm]
  rect 2.16x1.52 smd: 1(-4.13,3.81) 2(-4.13,1.27) 3(-4.13,-1.27) 4(-4.13,-3.81) 5(4.13,-3.81) 6(4.13,-1.27) 7(4.13,1.27) 8(4.13,3.81)
  silkscreen extent -6.14,-6.07 3.75,6.07
SW_2-1825059-3 [mm]
  rect 2.16x1.52 smd: 1(-4.13,5.08) 2(-4.13,2.54) 3(-4.13,0) 4(-4.13,-2.54) 5(-4.13,-5.08) 6(4.13,-5.08) 7(4.13,-2.54) 8(4.13,0) 9(4.13,2.54) 10(4.13,5.08)
  silkscreen extent -6.14,-7.34 3.75,7.34
SW_4-1825059-1 [mm]
  rect 2.16x1.52 smd: 1(-4.13,8.89) 2(-4.13,6.35) 3(-4.13,3.81) 4(-4.13,1.27) 5(-4.13,-1.27) 6(-4.13,-3.81) 7(-4.13,-6.35) 8(-4.13,-8.89) 9(4.13,-8.89) 10(4.13,-6.35) 11(4.13,-3.81) 12(4.13,-1.27) 13(4.13,1.27) 14(4.13,3.81) 15(4.13,6.35) 16(4.13,8.89)
  silkscreen extent -6.14,-11.15 3.75,11.15
SW_1825059-1 [mm]
  rect 2.16x1.52 smd: 1(-4.13,1.27) 2(-4.13,-1.27) 3(4.13,-1.27) 4(4.13,1.27)
  silkscreen extent -6.14,-3.53 3.75,3.53
SW_DS04-254-2-06BK-SMT-TR [mm]
  rect 1.5x1.1 smd: 1A(-4.45,6.35) 1B(4.45,6.35) 2A(-4.45,3.81) 2B(4.45,3.81) 3A(-4.45,1.27) 3B(4.45,1.27) 4A(-4.45,-1.27) 4B(4.45,-1.27) 5A(-4.45,-3.81) 5B(4.45,-3.81) 6A(-4.45,-6.35) 6B(4.45,-6.35)
  silkscreen extent -5.85,-8.12 3.1,8.12
TE_640452-2 [mm]
  rect 1.62x1.62 hole 1.08: 1(0,0)
  round 1.62 hole 1.08: 2(-2.54,0)
  silkscreen extent -3.81,-2.54 2.44,2.54
TO92127P495H495-3 [mm]
  oval 1.04x2.08 hole 0.84: 1(-1.27,0) 2(0,0) 3(1.27,0)
  silkscreen extent -2.48,-2.4 2.48,2.16
TVGA9000 [mil] "TVGA9000i Footprint"
  rect 118.1x13.8 smd mask+10: 1(1334.2,221) 2(1334.2,246.6) 3(1334.2,272.2) 4(1334.2,297.8) 5(1334.2,323.4) 6(1334.2,349) 7(1334.2,374.6) 8(1334.2,400.1) 9(1334.2,425.7) 10(1334.2,451.3) 11(1334.2,476.9) 12(1334.2,502.5) 13(1334.2,528.1) 14(1334.2,553.7) 15(1334.2,579.3) 16(1334.2,604.9) 17(1334.2,630.5) 18(1334.2,656.1) 19(1334.2,681.6) 20(1334.2,707.2) 21(1334.2,732.8) 22(1334.2,758.4) 23(1334.2,784) 24(1334.2,809.6) 25(1334.2,835.2) 26(1334.2,860.8) 27(1334.2,886.4) 28(1334.2,912) 29(1334.2,937.5) 30(1334.2,963.1) 31(1334.2,988.7) 32(1334.2,1014.3) 33(1334.2,1039.9) 34(1334.2,1065.5) 35(1334.2,1091.1) 36(1334.2,1116.7) 37(1334.2,1142.3) 38(1334.2,1167.9) 39(1334.2,1193.5) 40(1334.2,1219) 81(105.8,1219) 82(105.8,1193.4) 83(105.8,1167.8) 84(105.8,1142.2) 85(105.8,1116.6) 86(105.8,1091.1) 87(105.8,1065.5) 88(105.8,1039.9) 89(105.8,1014.3) 90(105.8,988.7) 91(105.8,963.1) 92(105.8,937.5) 93(105.8,911.9) 94(105.8,886.3) 95(105.8,860.7) 96(105.8,835.2) 97(105.8,809.6) 98(105.8,784) 99(105.8,758.4) 100(105.8,732.8) 101(105.8,707.2) 102(105.8,681.6) 103(105.8,656) 104(105.8,630.4) 105(105.8,604.8) 106(105.8,579.2) 107(105.8,553.7) 108(105.8,528.1) 109(105.8,502.5) 110(105.8,476.9) 111(105.8,451.3) 112(105.8,425.7) 113(105.8,400.1) 114(105.8,374.5) 115(105.8,348.9) 116(105.8,323.3) 117(105.8,297.8) 118(105.8,272.2) 119(105.8,246.6) 120(105.8,221)
  rect 13.8x118.1 smd mask+10: 41(1219,1334.2) 42(1193.4,1334.2) 43(1167.8,1334.2) 44(1142.2,1334.2) 45(1116.7,1334.2) 46(1091.1,1334.2) 47(1065.5,1334.2) 48(1039.9,1334.2) 49(1014.3,1334.2) 50(988.7,1334.2) 51(963.1,1334.2) 52(937.5,1334.2) 53(911.9,1334.2) 54(886.3,1334.2) 55(860.8,1334.2) 56(835.2,1334.2) 57(809.6,1334.2) 58(784,1334.2) 59(758.4,1334.2) 60(732.8,1334.2) 61(707.2,1334.2) 62(681.6,1334.2) 63(656,1334.2) 64(630.4,1334.2) 65(604.8,1334.2) 66(579.2,1334.2) 67(553.7,1334.2) 68(528.1,1334.2) 69(502.5,1334.2) 70(476.9,1334.2) 71(451.3,1334.2) 72(425.7,1334.2) 73(400.1,1334.2) 74(374.5,1334.2) 75(348.9,1334.2) 76(323.3,1334.2) 77(297.8,1334.2) 78(272.2,1334.2) 79(246.6,1334.2) 80(221,1334.2) 121(221,105.8) 122(246.6,105.8) 123(272.2,105.8) 124(297.8,105.8) 125(323.3,105.8) 126(348.9,105.8) 127(374.5,105.8) 128(400.1,105.8) 129(425.7,105.8) 130(451.3,105.8) 131(476.9,105.8) 132(502.5,105.8) 133(528.1,105.8) 134(553.7,105.8) 135(579.2,105.8) 136(604.8,105.8) 137(630.4,105.8) 138(656,105.8) 139(681.6,105.8) 140(707.2,105.8) 141(732.8,105.8) 142(758.4,105.8) 143(784,105.8) 144(809.6,105.8) 145(835.2,105.8) 146(860.7,105.8) 147(886.3,105.8) 148(911.9,105.8) 149(937.5,105.8) 150(963.1,105.8) 151(988.7,105.8) 152(1014.3,105.8) 153(1039.9,105.8) 154(1065.5,105.8) 155(1091.1,105.8) 156(1116.6,105.8) 157(1142.2,105.8) 158(1167.8,105.8) 159(1193.4,105.8) 160(1219,105.8)
  silkscreen extent -22,-22 1462,1462
VGA_Conn [mil]
  rect 60x60 hole 41 paste-60 mask+10: 1(90,783.9)
  round 60 hole 41 paste-60 mask+10: 2(90,693.7) 3(90,603.2) 4(90,513) 5(90,422.8) 6(190,828.6) 7(190,738.4) 8(190,648.2) 9(190,558.1) 10(190,467.9) 11(290,783.9) 12(290,693.7) 13(290,603.2) 14(290,513) 15(290,422.8)
  round 159.4 hole 120.1 paste-159.4 mask+10: Un1(190,121.1) Un2(190,1104.9)
  silkscreen extent 0,3 880,1223
XTAL_ABM3-20.000MHZ-B2-T [mm]
  rect 1.9x2.4 smd: 1(-2.05,0) 2(2.05,0)
  silkscreen extent -2.5,-1.6 2.5,1.6, body extent -2.5,-1.6 2.5,1.6, height 1.3
XTAL_ABM3-40.000MHZ-B2-T [mm]
  rect 1.9x2.4 smd: 1(-2.05,0) 2(2.05,0)
  silkscreen extent -2.5,-1.6 2.5,1.6
XTAL_ABM7-24.000MHZ-D2Y-T [mm]
  rect 1.9x2.6 smd: 1(-2.15,0) 2(2.15,0)
  silkscreen extent -3,-1.75 3,1.75, body extent -3,-1.75 3,1.75, height 1.4
XTAL_MS1V-T1K-32.768KHZ-7PF-20PPM-TA-QC-AU [mm]
  rect 1x1.6 smd: 1(-1.3,-3.55) 2(1.3,-3.55)
  rect 3x2.5 smd: S1(0,2.7)
  silkscreen extent -1,-2.43 1,1.13, body extent -1.38,-4.05 1.38,4.05, height 2.08
Y3014B [mil]
  rect 55x55 hole 32 paste-55 mask+0: 1(57.05,18.33)
  round 55 hole 32 paste-55 mask+0: 2(157.05,18.33) 3(257.05,18.33) 4(357.05,18.33) 5(357.05,318.33) 6(257.05,318.33) 7(157.05,318.33) 8(57.05,318.33)
  silkscreen extent 7,68 407,268
YM3812 [mil]
  rect 55x55 hole 32 paste-55 mask+0: 1(95,5)
  round 55 hole 32 paste-55 mask+0: 2(195,5) 3(295,5) 4(395,5) 5(495,5) 6(595,5) 7(695,5) 8(795,5) 9(895,5) 10(995,5) 11(1095,5) 12(1195,5) 13(1195,605) 14(1095,605) 15(995,605) 16(895,605) 17(795,605) 18(695,605) 19(595,605) 20(495,605) 21(395,605) 22(295,605) 23(195,605) 24(95,605)
  silkscreen extent 5,55 1285,555